# Altium PCB EFNMR_POLARIZATION_V1.PcbDoc
Units mil, origin at the board's own origin, x right, y up, seen from the top; angles counter-clockwise.
Board outline 2550 x 3480 mil, 2 copper layers (Top Layer, Bottom Layer); 17 components, 13 nets, 49 pads, 2 vias.
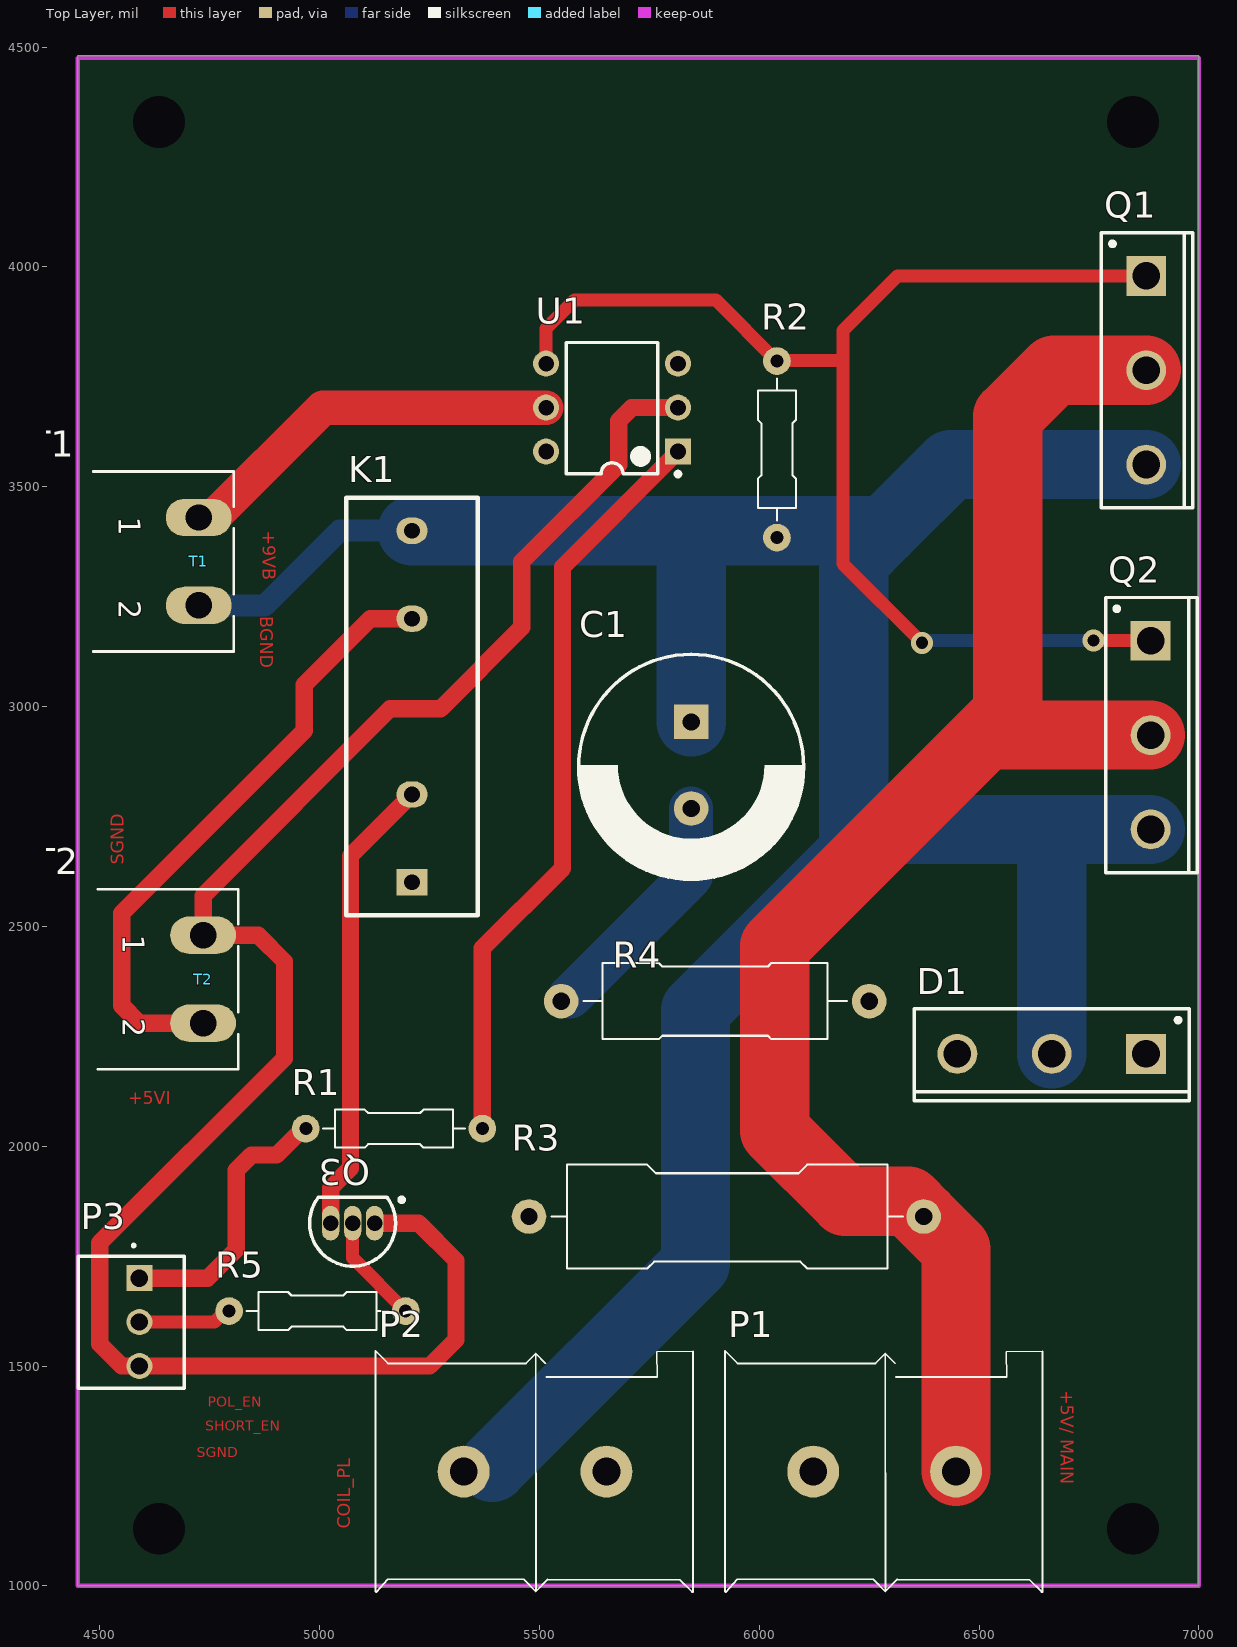
[diagram p0: Top Layer view]
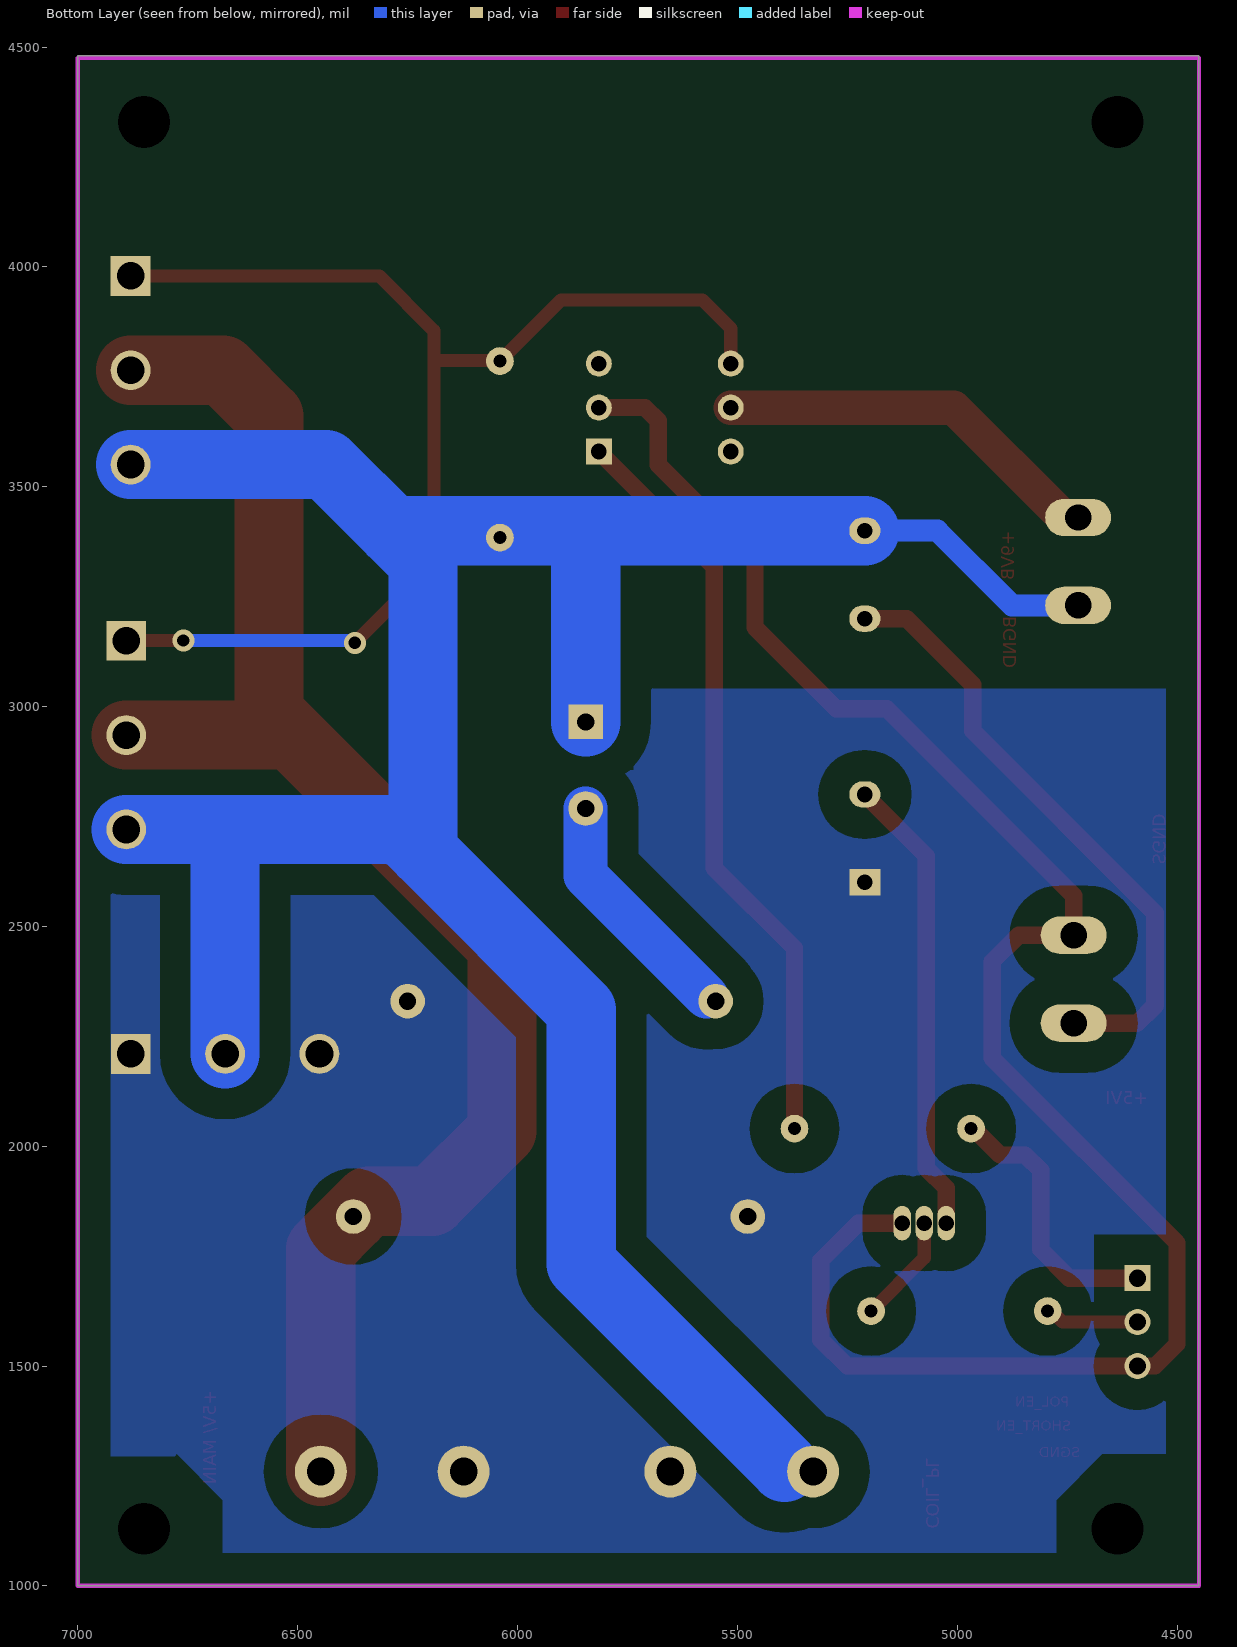
[diagram p1: Bottom Layer view, seen from below]
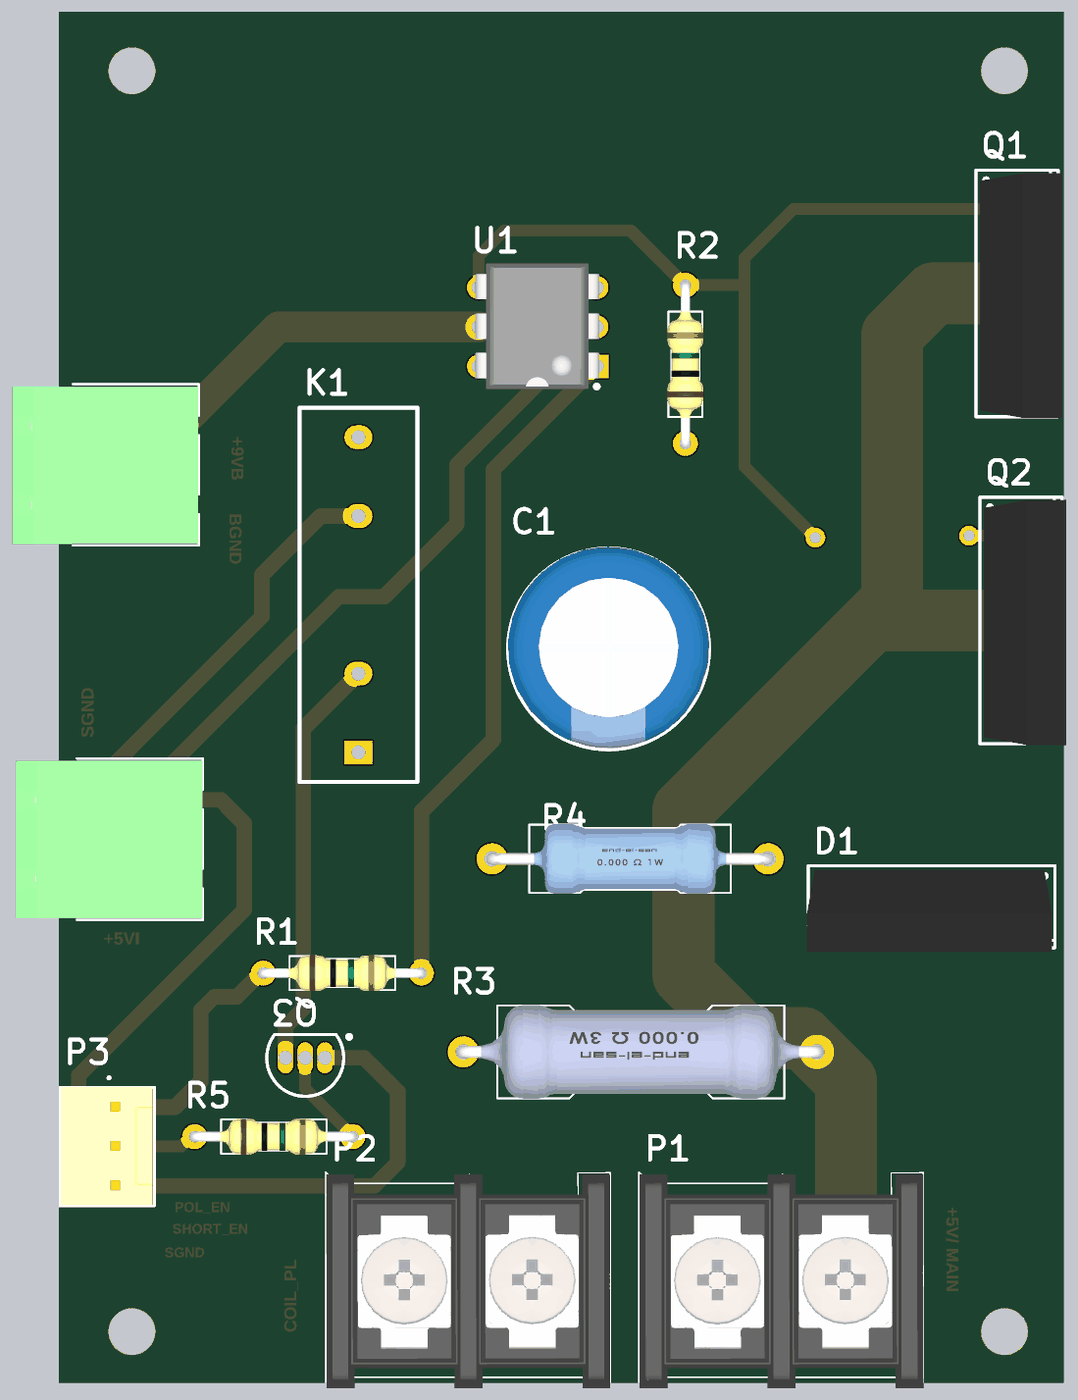
[diagram p2: 3D render of the assembled board from above, using the file's embedded part models]

## Layer stack, top to bottom
Top Solder: solder mask 0.4, Solder Resist, Dk 3.5
Top Layer: signal copper 1.4
Dielectric 1: dielectric 12.6, FR-4, Dk 4.8
Bottom Layer: signal copper 1.4
Bottom Solder: solder mask 0.4, Solder Resist, Dk 3.5

## Board outline
4450,1000 7000,1000 7000,4480 4450,4480

## Design rules (kind name [scope] priority, off if disabled: settings)
Clearance [All] p1: gap=10 ignorepadtopadclearanceinfootprint=FALSE except(0: Arc-Hole Track-Hole SMDPad-Hole THPad-Hole Via-Hole Fill-Hole Poly-Hole Region-Hole Text-Hole; 70: Arc-Fill Arc-Poly Arc-Region Track-Fill Track-Poly Track-Region SMDPad-Fill SMDPad-Poly SMDPad-Region THPad-Fill THPad-Poly THPad-Region Via-Fill Via-Poly Via-Region Fill-Fill Fill-Poly Fill-Region Poly-Poly Poly-Region Region-Region)
Height [All] p1: minheight=0 maxheight=50000 prefheight=500
PolygonConnect [All] p1: connectstyle=Direct reliefconductorwidth=10 reliefentries=4 polygonreliefangle="90 Angle" airgapwidth=10
RoutingVias [All] p1: holewidth=28 width=50 viastyle="Through Hole" minholewidth=28 minwidth=50 maxholewidth=28 maxwidth=50
SolderMaskExpansion [All] p1: expansion=4
Width [All] p1: maxlimit=3937.01 minlimit=10 preferedwidth=20 minimp=50.000000 maximp=50.000000 favimp=50.000000
29 further rules are at their usual default settings.

## Components (designator, comment, footprint, x,y, rotation, side; value= is the part's Value field where it differs from the comment)
C1 "1000uF/200V" "CAP ELECTROLITIC RADIAL 13X25-5" 5845,2866.57 r270 top
D1 "MUR3060WT" TO-247AC 6879.57,2210 r180 top
K1 "Relay-SPST" HE3351A0500 5210,2600 r90 top
P1 "PowerIn" "KF35C 2PIN" 6285,1260 r0 top
P2 "Polarized Coil" "KF35C 2PIN" 5490,1260 r0 top
P3 "Header 3" DS1070-3-COMCON 4590,1700 r270 top
Q1 "IRFP4768" TO-247AC 6880,3979.57 r270 top
Q2 "IRFP4768" TO-247AC 6890,3149.57 r270 top
Q3 "2N3904" TO-92A 5075,1825 r90 top
R1 "400" "AXIAL 0_25 W, 0_4 IN LEAD PITCH" 5169.21,2040 r0 top
R2 "15K" "AXIAL 0_25 W, 0_4 IN LEAD PITCH" 6040,3585 r90 top
R3 "10W" "AXIAL 3W 9_0MM" 5925,1840 r180 top value=5
R4 "22" "Axial 1W  7_0mm" 5899.61,2330 r0 top
R5 "1K" "AXIAL 0_25 W, 0_4 IN LEAD PITCH" 4995,1625 r0 top
T1 "Battery" "MSTB 2,5/2-G-5,08" 4725,3330 r270 top
T2 "1770711" "MSTB 2,5/2-G-5,08" 4735,2380 r270 top
U1 "4N46" DIP-6 5815,3580 r180 top

## Footprints (in the part's own frame and the unit in brackets; to place one, negate y for a bottom-side part, rotate by r counter-clockwise, add the part's x,y. Pads: shape width x height; smd on the part's side, far side on the other; paste and mask are expansions set on the pad)
"AXIAL 0_25 W, 0_4 IN LEAD PITCH" [mm] "Designer Abbas Basereh"
  round 1.6 hole 0.75: 1(5.1,0) 2(-5.1,0)
  silkscreen extent -4.1,-1.1 4.1,1.1, body extent -5.4,-1.16 5.36,1.16, height 3.63
"Axial 1W  7_0mm" [mm] "Designer Abbas Basereh"
  round 2 hole 1: 1(8.9,0) 2(-8.9,0)
  silkscreen extent -7.6,-2.2 7.6,2.2, body extent -9.26,-2.25 9.27,2.25, height 5.22
"AXIAL 3W 9_0MM" [mm] "Designer Abbas Basereh"
  round 2 hole 1: 1(11.4,0) 2(-11.4,0)
  silkscreen extent -10.2,-3 10.1,3, body extent -11.83,-3.01 11.84,3.01, height 6.73
"CAP ELECTROLITIC RADIAL 13X25-5" [mm] "Cap electrolitic radial 13x25-5-Design:Abbas Basereh"
  rect 2x2 hole 1: 1(-2.5,0)
  round 2 hole 1: 2(2.5,0)
  silkscreen extent -6.4,-6.5 6.6,6.5, body extent -6.5,-6.5 6.5,6.5, height 25.2
DIP-6 [mm]
  rect 1.5x1.5 hole 0.9: 1(0,0)
  round 1.5 hole 0.9: 2(0,-2.54) 3(0,-5.08) 4(7.62,-5.08) 5(7.62,-2.54) 6(7.62,0)
  silkscreen extent -0.13,-6.3 6.46,1.42, body extent -0.16,-6.63 7.84,1.45, height 4.31
DS1070-3-COMCON [mm]
  rect 1.5x1.5 hole 1: 1(0,0)
  round 1.5 hole 1: 2(2.54,0) 3(5.08,0)
  silkscreen extent -1.92,-3.53 6.35,2.59, body extent -1.3,-3.43 6.32,2.47, height 11.4
HE3351A0500 [mm]
  rect 1.524x1.8 hole 0.9: 1(0,0)
  oval 1.524x1.8 hole 0.9: 2(5.08,0) 3(15.24,0) 4(20.32,0)
  silkscreen extent -1.91,-3.8 22.22,3.8, body extent -1.91,-3.89 22.3,3.89, height 9.75
"KF35C 2PIN" [mm]
  round 3 hole 1.6: 1(-4.125,0) 2(4.125,0)
  silkscreen extent -9.22,-6.97 9.12,6.97, body extent -9.18,-6.97 9.13,6.83, height 15.07
"MSTB 2,5/2-G-5,08" [mil] "Header, Nominal current: 12 A Rated voltage (III/2): 320 V Number of positions: 2 Pitch: 5.08 mm Color: green Contact surface: Tin Assembly: Soldering DESIGNER:ABBAS BASEREH"
  oval 85x150 hole 60: 1(-100,0) 2(100,0)
  silkscreen extent -205,-240 205,80, body extent -199,-394 201,79, height 340
TO-92A [mm] "TO, Flat Index; 3 In-Line, Axial Leads; Body Dia. 4.5mm; Leads 0.51 x 0.48 mm (max)"
  oval 2x1 hole 0.9: 1(0,-1.27) 2(0,0) 3(0,1.27)
  silkscreen extent -2.48,-2.96 1.5,2.48, body extent -2.48,-2.5 1.5,2.5, height 6.86
TO-247AC [mm]
  rect 2.3x2.3 hole 1.6: 1(0,0)
  round 2.3 hole 1.6: 2(5.45,0) 3(10.9,0)
  silkscreen extent -2.5,-2.6 13.4,2.7, body extent -2.31,-2.35 13.49,2.96, height 25

## Part data
C1: library part Cap2, "Capacitor", PackageDescription="Capacitor; 2 Leads", PackageReference=CAPR5-4X5, Published=23-Sep-2002, Publisher="Altium Limited"
D1: "SWITCHMODE(TM) Power Rectifier, 3-Pin TO-247, Tube", Manufacturer="On Semiconductor", Supplier Part Number 1=MUR3060WTOS-ND, ComponentLink1Description="Manufacturer URL", ComponentLink1URL=http://www.onsemi.com/, ComponentLink2Description=Datasheet, ComponentLink2URL=http://www.onsemi.cn/pub_link/Collateral/MUR3020WT-D.PDF, ComponentLink3Description="Package Specification", ComponentLink3URL=http://www.onsemi.cn/pub_link/Collateral/340L-02.PDF, DatasheetVersion="Rev. 6", IFSM Max (A)=150, Mounting Technology="Through Hole", PackageDescription="3-Pin Flange Mount, Vertical Straight Lead, Body 16.005 x 5 mm, Pitch 5.45 mm", PackageReference=TO-247-3-340L-02, PackageVersion="Rev. F, 10/2011", Packing=Tube, PartNumber=MUR3060WT, RoHS=FALSE, Supplier 1=Digi-Key, Type=Ultrafast, VRRM Max (V)=600
K1: "Single-Pole Single-Throw Relay", LatestRevisionDate=17-Jul-2002, LatestRevisionNote="Re-released for DXP Platform.", PackageReference=MODULE4, Published=24-Mar-1999, Publisher="Altium Limited"
P1 P2: library part "Header 2", "Header, 2-Pin", LatestRevisionDate=17-Jul-2002, LatestRevisionNote="Re-released for DXP Platform.", Publisher="Altium Limited"
P3: "Header, 3-Pin", LatestRevisionDate=17-Jul-2002, LatestRevisionNote="Re-released for DXP Platform.", Publisher="Altium Limited"
Q1 Q2: library part IRFP450, "HEXFET Power MOSFET", Code_JEDEC=TO-247-AC, ComponentLink1Description="Manufacturer Link", ComponentLink1URL=http://www.irf.com/, ComponentLink2Description=Datasheet, ComponentLink2URL=http://www.irf.com/product-info/datasheets/data/irfp450.pdf, DatasheetVersion=PD-9.458C, LatestRevisionDate=17-Jul-2002, LatestRevisionNote="Re-released for DXP Platform.", Note="Pin 2 is electrically connected to the Heatsink (4).", PackageDescription="SIP with Mounting Hole; 3 Leads; Body 20 x 15.6 x 5 mm (typ); Pitch 5.45 mm", PackageReference=TO-247AC, PackageVersion=Aug-1997, Published=8-Jun-2000, Publisher="Altium Limited"
Q3: "NPN General Purpose Amplifier", ComponentLink1Description="Manufacturer Link", ComponentLink1URL=http://www.fairchildsemi.com/, ComponentLink2Description=Datasheet, ComponentLink2URL=http://www.fairchildsemi.com/ds/2N%2F2N3904.pdf, DatasheetVersion=1997, LatestRevisionDate=15-Jan-2003, LatestRevisionNote="PCB Footprint 'BCY-W3/D4.7' replaced", PackageDescription="TO, Flat Index; 3 In-Line, Axial Leads; Body Dia. 4.5mm; Leads 0.51 x 0.48 mm (max)", PackageReference=TO-92A, PackageVersion=Sep-1998, Published=8-Jun-2000, Publisher="Altium Limited"
R1 R2 R3 R4 R5: library part Res1, "Resistor", LatestRevisionDate=17-Jul-2002, LatestRevisionNote="Re-released for DXP Platform.", PackageDescription="Axial Device, Thru-Hole; 2 Leads; 0.3 in Pin Spacing", PackageReference=AXIAL-0.3, Published=8-Jun-2000, Publisher="Altium Limited"
T1 T2: library part CON_Phoenix_MSTB_02, "2 Pitch: 5.08 mm Color: green Contact surface: Tin Assembly", Manufacturer="PHOENIX CONTACT", Max Current="12 A", Voltage="320 V", Category=Connector, ComponentLink1Description="Header, Nominal current: 12 A Rated voltage (III/2): 320 V Number of positions: 2 Pitch: 5.08 mm Color: green Contact surface: Tin Assembly: Soldering  DESIGNER:ABBAS BASEREH", ComponentLink2Description=Reference, Connector Type="PCB Terminal Block", Designer="ABBAS BASEREH", Mounting Technology=Through-Hole, PART.NO=1770711, Pin Count=2, Positions=2, Revision 1=2017-3-1, Status=Unreleased
U1: "Optocouplers"

## Free pads (board coordinates)
  round 60 hole 118.11: 20(6850,1130) 21(4635,1130) 22(4635,4330) 23(6850,4330)

## Via types
v1: diameter 50, hole 28, Top Layer to Bottom Layer, 2 vias

## Nets (pads, with @x,y where several pads share a name; then routed paths per layer and width w, separated by ;. In a path a pad name is that pad's centre, name@x,y a point inside that pad or via, vN(x,y) a via of type N, cw(c..) or ccw(c..) an arc to the next point about the centre after c; other vN are vias at no path point)
+5V: P1.2 Q1.2 Q2.2 R3.2 | length 3608.1
  Top Layer w157.48: P1.2 6447.4,1766.42 R3.2 6338.82,1875 6195,1875 6035,2035 6035,2455 6515,2935 ; Q1.2 6670,3765 6565,3660 6565,2985 6515,2935 ; Q2.2 6515,2935
+5VI: K1.3 T2.2 | length 1410.6
  Top Layer w40: T2.2 4590,2280 4550,2320 4550,2530 4965,2945 4965,3050 5115,3200 K1.3
+9VB: T1.1 U1.5 | length 893.6
  Top Layer w78.74: T1.1 4757.5,3430 5007.5,3680 U1.5
BGND: C1.1 D1.2 K1.4 P2.1 Q1.3 Q2.3 R2.2 T1.2 | length 6430.8
  Bottom Layer w50: T1.2 4875,3230 5045,3400 K1.4
  Bottom Layer w157.48: K1.4 5845,3400 ; 5392.6,1270 5855,1732.4 5855,2310 6215,2670 ; C1.1 5845,3400 ; D1.2 6665,2715.43 6660,2720.43 ; Q1.3 6435.43,3550.43 6285,3400 ; Q2.3 6660,2720.43 ; 5845,3400 6285,3400 ; 6215,2670 6265.43,2720.43 6660,2720.43 ; 6215,2670 6215,3330 6285,3400
NetC1_2: C1.2 R4.2 | length 542.2
  Bottom Layer w100: R4.2@5569.61,2340 5845,2615.39 C1.2
NetK1_2: K1.2 Q3.3 | length 1051.7
  Top Layer w39.37: Q3.3 5025,1905 5070,1950 5070,2660.18 5209.82,2800 K1.2
NetQ1_1: Q1.1 Q2.1 R2.1 U1.4 | length 2887.7
  Top Layer w30: U1.4 5515,3860 5580,3925 5900.79,3925 R2.1 6041.12,3786.91 6186.91,3786.91 6190,3790 ; v1(6370,3145) 6190,3325 6190,3790 ; v1(6760,3150) 6889.57,3150 Q2.1 ; Q1.1 6314.57,3979.57 6190,3855 6190,3790
  Bottom Layer w30: v1@6370,3150 v1(6760,3150)
NetQ3_2: Q3.2 R5.1 | length 250
  Top Layer w30: Q3.2 5075,1745.79 R5.1
NetR1_1: R1.1 U1.1 | length 1724.3
  Top Layer w39.37: R1.1 5370,2450 5552.5,2632.5 5552.5,3317.5 U1.1
PGND: D1.1 D1.3 K1.1 P1.1 P2.2 R3.1 R4.1
Polarized_EN: P3.1 R1.2 | length 624.7
  Top Layer w39.37: P3.1 4745,1700 4810,1765 4810,1945 4844.81,1979.81 4901.83,1979.81 4962.03,2040 4964.21,2040 R1.2
SGND: P3.3 Q3.1 T2.1 U1.2 | length 4285.8
  Top Layer w39.37: Q3.1 5225,1825 5310,1740 5310,1560 5250,1500 P3.3 4550,1500 4500,1550 4500,1780 4920,2200 4920,2420 4860,2480 T2.1 4735,2570 5160,2995 5275,2995 5460,3180 5460,3330 5680,3550 5680,3650 5710,3680 U1.2
Short_Polarized: P3.2 R5.2 | length 214.6
  Top Layer w30: P3.2 4760.28,1600 4785.28,1625 R5.2
pads on no net: U1.3 U1.6

## Polygon pours and split planes (outlines as drawn)
PGND on Bottom Layer (solid, remove dead copper, pour order 0): 7000,3042.44 4450,3040 4450,1300 4670,1300 4775,1195 4775,1000 6675,1000 6670,1005 6670,1195 6775,1300 6780,1295 7000,1295

## Keep-outs
Keep-Out Layer:
  lines w10: 4450,1000 7000,1000 7000,4475 4450,4475 4450,1000

## Other copper
Top Layer:
  text "+9VB" at 4860,3400 h50 r270
  text "BGND" at 4855,3205 h50 r270
  text "SGND" at 4565,2640 h50 r90
  text "+5VI" at 4565,2085 h50
  text "+5V/ MAIN" at 6675,1445 h50 r270
  text "POL_EN" at 4745,1400 h40
  text "SHORT_EN" at 4740,1345 h40
  text "SGND" at 4720,1285 h40
  text "COIL_PL" at 5080,1130 h50 r90

## Dimensions
4450,4475 to 7000,4475 on Mechanical 1
7000,1000 to 7000,4475 on Mechanical 1

## Text inside footprints (layer, text, board x,y; h text height)
T1: Top Overlay "1" at 4542.52,3431.26 h50 r270; Top Overlay "2" at 4542.52,3241.26 h50 r270
T2: Top Overlay "1" at 4552.52,2481.26 h50 r270; Top Overlay "2" at 4552.52,2291.26 h50 r270